# Altium PCB v1.0.PcbDoc
Units mm, origin at the board's own origin, x right, y up, seen from the top; angles counter-clockwise.
Board outline 33.9 x 45.2 mm, 2 copper layers (Top Layer, Bottom Layer), stack 1.569 mm thick; 15 components, 15 nets, 65 pads, 9 vias.
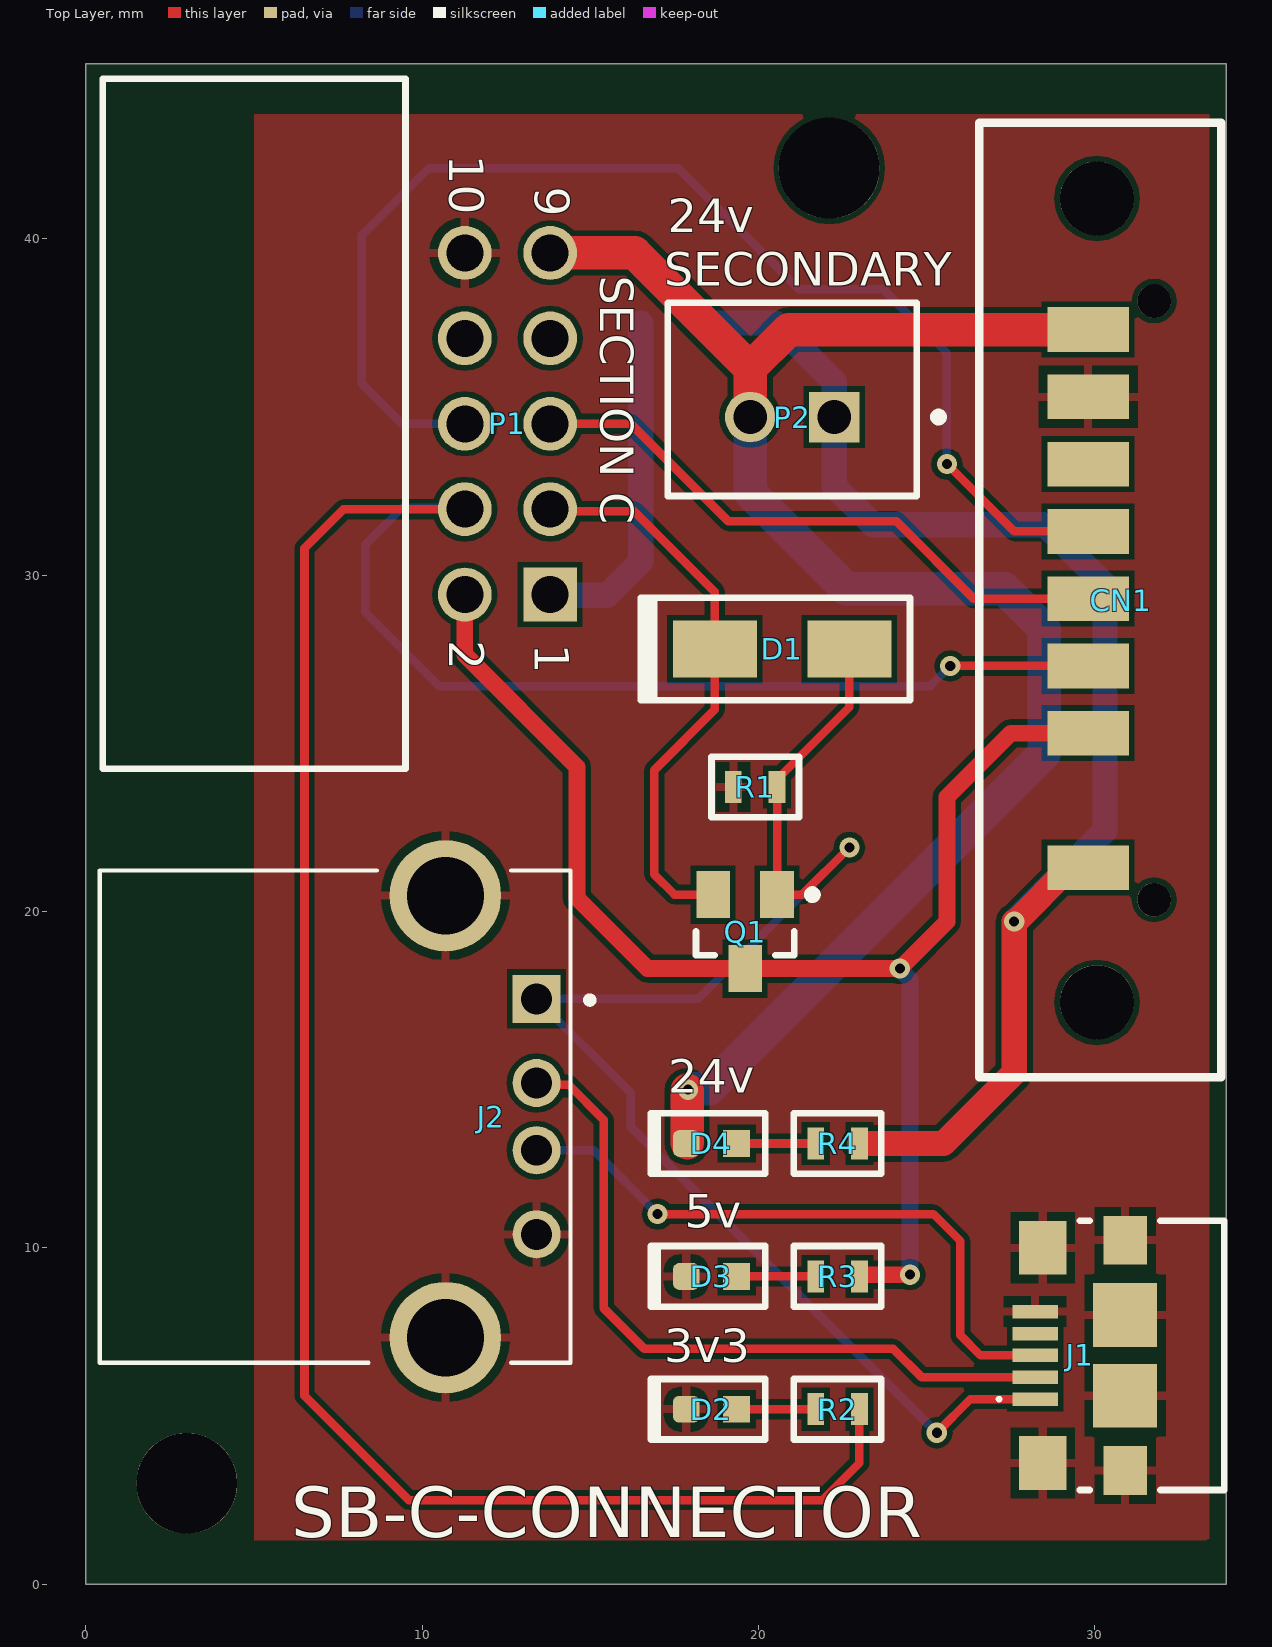
[diagram p0: Top Layer view]
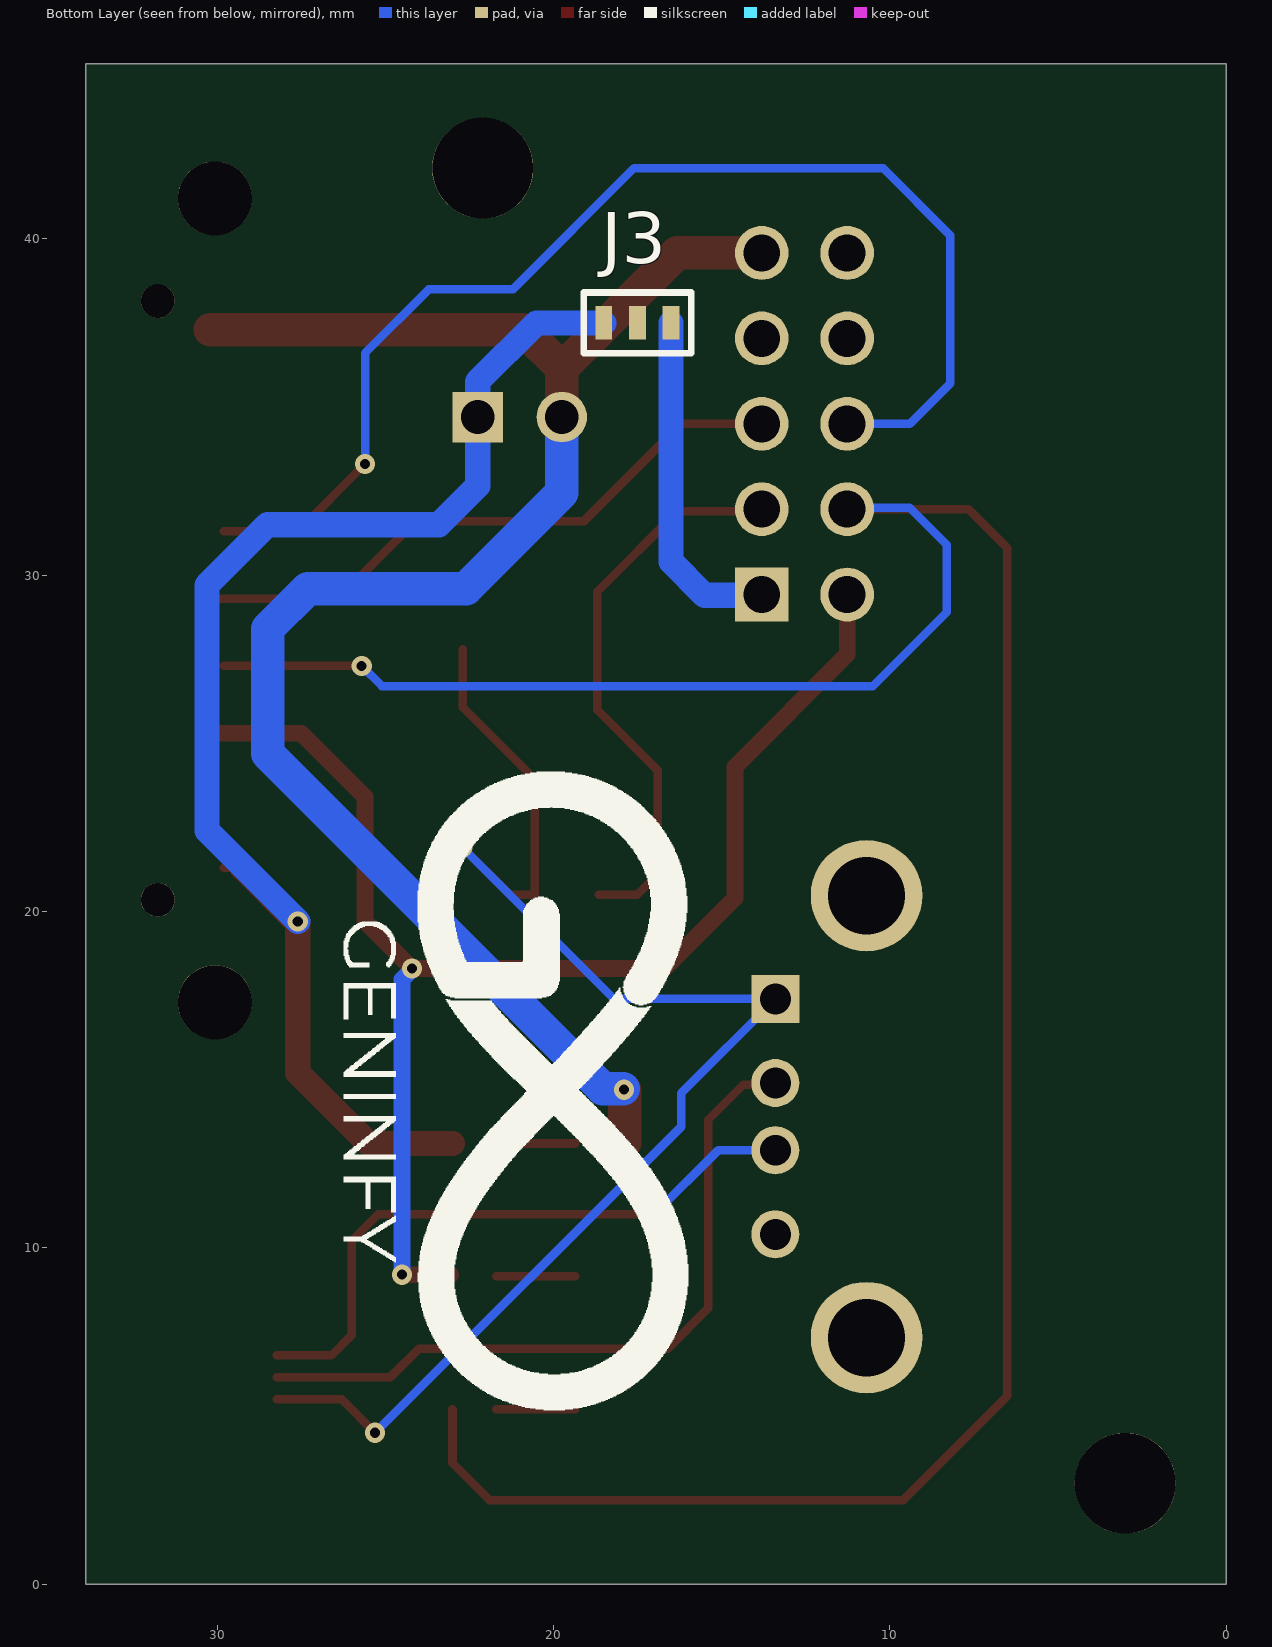
[diagram p1: Bottom Layer view, seen from below]
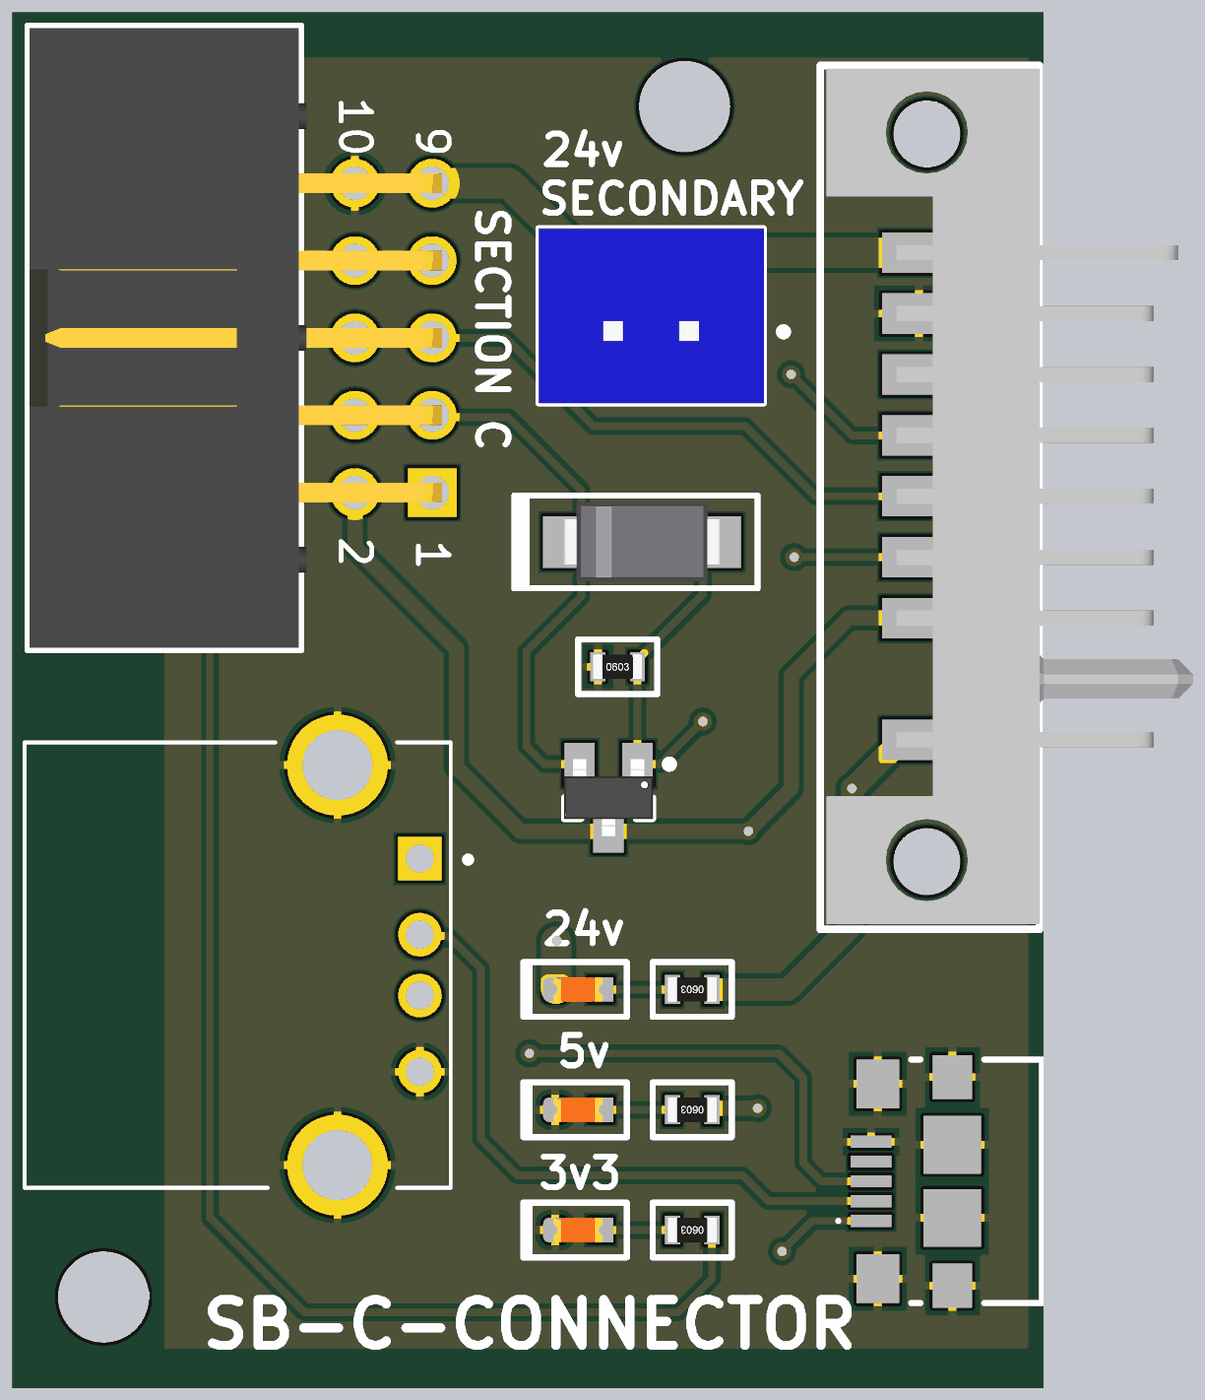
[diagram p2: 3D render of the assembled board from above, using the file's embedded part models]

## Layer stack, top to bottom
Top Solder: solder mask 0.0254, SM-001, Dk 4
Top Layer: signal copper 0.035
Dielectric 1: core 1.4986, Core-043, Dk 4.3
Bottom Layer: signal copper 0.035
Bottom Solder: solder mask 0.0254, SM-001, Dk 4

## Board outline
0,0 33.9,0 33.9,45.2 0,45.2

## Design rules (kind name [scope] priority, off if disabled: settings)
Clearance [All] p1: gap=0.16 ignorepadtopadclearanceinfootprint=FALSE
HoleSize [All] p1: absolutevalues=TRUE maxlimit=4 minlimit=0.025 maxpercent=80.000 minpercent=20.000
PolygonConnect [All] p1: connectstyle=Relief reliefconductorwidth=0.254 reliefentries=4 polygonreliefangle="90 Angle" airgapwidth=0.254
RoutingVias [All] p1: holewidth=0.711 width=1.27 viastyle="Through Hole" minholewidth=0.711 minwidth=1.27 maxholewidth=0.711 maxwidth=1.27
SilkToSolderMaskClearance [IsPad] p1: minsilkscreentomaskgap=0.2 clearancetoexposedcopper=TRUE
SolderMaskExpansion [All] p1: expansion=0.102 istentingtop=FALSE
Width [All] p1: maxlimit=4 minlimit=0.254 preferedwidth=0.254
28 further rules are at their usual default settings.

## Components (designator, comment, footprint, x,y, rotation, side; value= is the part's Value field where it differs from the comment)
CN1 "Battery CONN" 1747785-1 31.762,20.348 r90 top
D1 "1N4007" "M7 1N4007 SMA" 20.7,27.8 r180 top
D2 "LED - Orange" LED0603-Orange 18.6,5.2 r0 top
D3 "LED - Orange" LED0603-Orange 18.6,9.15 r0 top
D4 "LED - Orange" LED0603-Orange 18.6,13.1 r0 top
J1 "1981568-1" TECO-1981568-5_V 28.225,6.8 r90 top
J2 "292303-6" TE_292303-6 13.4,17.4 r270 top
J3 "Solder Jumper" "Solder Jumper" 17.5,37.5 r180 bottom
P1 "61201021721" 61201021721 5,34.5 r270 top
P2 "B2B-XH-A(LF)(SN)" JST-B2B-XH-A_V 21,34.7 r180 top
Q1 "FDN340P" FAIR-SSOT3L-3_V 19.6,19.4 r270 top
R1 "10k" "10k R0603" 19.9,23.7 r0 top
R2 "68R" "68R 0603" 22.35,5.2 r180 top
R3 "68R" "68R 0603" 22.35,9.15 r180 top
R4 "68R" "68R 0603" 22.35,13.1 r180 top

## Footprints (in the part's own frame and the unit in brackets; to place one, negate y for a bottom-side part, rotate by r counter-clockwise, add the part's x,y. Pads: shape width x height; smd on the part's side, far side on the other; paste and mask are expansions set on the pad)
"10k R0603" [mm]
  rect 0.5x0.95 smd: 1(-0.65,0) 2(0.65,0)
  silkscreen extent -1.3,-0.9 1.3,0.9, body extent -0.8,-0.4 0.8,0.4, height 0.45
"68R 0603" [mm]
  rect 0.5x0.95 smd: 1(-0.65,0) 2(0.65,0)
  silkscreen extent -1.3,-0.9 1.3,0.9, body extent -0.8,-0.4 0.8,0.4, height 0.45
1747785-1 [mm]
  rect 1.33x2.43 smd: 1(0.951,1.962) 2(4.951,1.962) 3(6.951,1.962) 4(8.952,1.962) 5(10.952,1.962) 6(12.952,1.962) 7(14.952,1.962) 8(16.952,1.962)
  round 2.2 hole 2.2 unplated: ""(-3.05,1.7) ""(20.85,1.7)
  round 1 hole 1 unplated: ""(0,0) ""(17.8,0)
  Top Layer lines w0.254: 20.838,1.712 20.826,1.7
  silkscreen extent -5.27,-2 23.1,5.2, body extent -5.1,-7.05 23,5, height 4.71
61201021721 [mm] "10 pins, right angled, gold plating"
  rect 1.6x1.6 hole 1.1: 1(5.08,8.805)
  round 1.6 hole 1.1: 2(5.08,6.265) 3(2.54,8.805) 4(2.54,6.265) 5(0,8.805) 6(0,6.265) 7(-2.54,8.805) 8(-2.54,6.265) 9(-5.08,8.805) 10(-5.08,6.265)
  silkscreen extent -10.26,-4.5 10.26,4.5, body extent -10.18,-4.42 10.18,9.13, height 9.23
FAIR-SSOT3L-3_V [mm] "SOT23, 3-Leads, Body 2.92x1.4mm, Pitch 0.95mm"
  rect 1.4x1 smd: 1(-1.1,0.95) 2(-1.1,-0.95) 3(1.1,0)
  silkscreen extent -1.22,-1.46 0.7,2.13, body extent -1.26,-1.46 1.26,1.46, height 1.12
JST-B2B-XH-A_V [mm] "Header, 2-Leads, Body 7.4x5.75mm, Pitch 2.5mm"
  rect 1.5x1.5 hole 1: 1(-1.25,0)
  round 1.5 hole 1: 2(1.25,0)
  silkscreen extent -4.47,-3.4 3.7,2.35, body extent -3.7,-3.4 3.7,2.35, height 7
LED0603-Orange [mm]
  rrect50% 0.8x0.8 smd: 1(-0.75,0)
  rect 0.8x0.8 smd: 2(0.75,0)
  silkscreen extent -1.8,-0.9 1.6,1, body extent -0.8,-0.4 0.8,0.4, height 0.7
"M7 1N4007 SMA" [mm]
  rect 2.5x1.7 smd: 1(-2,0) 2(2,0)
  silkscreen extent -3.8,-1.6 4.2,1.52, body extent -2.6,-1.3 2.6,1.3, height 2.42
"Solder Jumper" [mm]
  rect 0.5x1 smd: 1(-1,0) 2(0,0) 3(1,0)
  silkscreen extent -1.6,-0.9 1.6,0.9
TE_292303-6 [mm]
  rect 1.428x1.428 hole 0.92: 1(0,0)
  round 1.428 hole 0.92: 2(2.5,0) 3(4.5,0) 4(7,0)
  round 3.316 hole 2.3: S1(-3.07,-2.71) S2(10.07,-2.71)
  silkscreen extent -3.82,-12.99 10.81,1.68
TECO-1981568-5_V [mm] "SMD, 5-Leads, Body 8x5.9mm, Pitch 0.65mm"
  rect 0.4x1.35 smd: 1(-1.3,0) 2(-0.65,0) 3(0,0) 4(0.65,0) 5(1.3,0)
  rect 1.6x1.4 smd: 6(-3.2,-0.225) 7(3.2,-0.225)
  rect 1.45x1.3 smd: 8(-3.425,-2.675) 9(3.425,-2.675)
  rect 1.9x1.9 smd: 10(-1.2,-2.675) 11(1.2,-2.675)
  silkscreen extent -4,-5.63 4,1.12, body extent -4,-5.63 4,0.28, height 3

## Part data
CN1: library part 1747785-1
D1: library part 1N4007FLTR, "1000V 1A Rectifier", Manufacturer="Sangdest Microelectronics", Supplier Part Number 1=1655-1N4007FLCT-ND, Manufacturer Part Number=1N4007FLTR, Pricing 1="1=0.10000, 10=0.06600, 100=0.03120, 500=0.01848, 1000=0.01241 (USD)", RoHS=No, Stock 1=2517, Supplier 1=Digi-Key
D2 D3 D4: library part LTST-C191KFKT, "LED ORANGE CLEAR SMD", Case Code (Imperial)=0603, Case Code (Metric)=1608, Color=Orange, Forward Current=30mA, Forward Voltage=2V, Lens Color=Colorless, Manufacturer="Vishay Lite-On", Max Operating Temperature=85°C, Min Operating Temperature=-55°C, Package Quantity=1, Power Dissipation=75mW, Reverse Voltage=5V, Supplier Part Number 1=160-1445-1-ND, Test Current=20mA, Case/Package=0603, Category=LEDs, ComponentLink1Description=https://datasheet.ciiva.com/2109/ltst-c191kfkt-2109968.pdf?src-supplier=Digi-Key, ComponentLink1URL=https://datasheet.ciiva.com/2109/ltst-c191kfkt-2109968.pdf?src-supplier=Digi-Key, ComponentLink2Description=https://datasheet.ciiva.com/12400/100-ltst-c191kfkt-39904-12400811.pdf?src-supplier=Mouser, ComponentLink2URL=https://datasheet.ciiva.com/12400/100-ltst-c191kfkt-39904-12400811.pdf?src-supplier=Mouser, ComponentLink3Description=https://datasheet.ciiva.com/11775/0900766b80dc02b0-11775613.pdf?src-supplier=RSComponents, ComponentLink3URL=https://datasheet.ciiva.com/11775/0900766b80dc02b0-11775613.pdf?src-supplier=RSComponents, ComponentLink4Description=https://datasheet.ciiva.com/15201/getdatasheetpartid-631075-15201391.pdf?src-supplier=Verical, ComponentLink4URL=https://datasheet.ciiva.com/15201/getdatasheetpartid-631075-15201391.pdf?src-supplier=Verical, ComponentLink5Description=https://datasheet.ciiva.com/2109/s-110-ltst-c191kfkt-2109969.pdf?src-supplier=Digi-Key, ComponentLink5URL=https://datasheet.ciiva.com/2109/s-110-ltst-c191kfkt-2109969.pdf?src-supplier=Digi-Key, Depth=0.8mm, Dominant Wavelength=605nm, Height=0.55mm, Illumination Color=Orange, Lead Free="Lead Free", Length=1.6mm, Lens Style=Diffused,Colorless,Rectangular, Lens Transparency=Clear, Luminous Intensity=90mcd, Manufacturer Part Number=LTST-C191KFKT, Mount="Surface Mount", Number of Elements=1, Number of LEDs=1, Number of Pins=2, Packaging="Tape and Reel", Power Rating=75mW, Pricing 1="1=0.24000, 10=0.17900, 100=0.08460, 500=0.05640, 1000=0.04418, 2500=0.04324 (USD)", Radiation Hardening=No, RoHS=Yes, Stock 1=92562, Supplier 1=Digi-Key, Viewing Angle=130°, Wavelength=611nm, Width=0.8mm
J1: library part CMP-2000-05408-1, "Micro USB Receptacle Standard Type B Assy, 5-Pin SMD, RoHS, Tape and Reel", Current Rating (Max)=1/ContactA, Manufacturer="TE Connectivity", Operating Temp Range=-55Cto85C, Operating Temperature Max Deg. C=85C, Operating Temperature Min Deg. C=-55C, Voltage Rating Max=30VAC, Body Orientation=RightAngle, Contact Material=CopperAlloy, Contact Plating=GoldOverNickel, Datasheet URL=http://www.mouser.com/ds/2/418/NG_CD_1981568_E2-621296.pdf, Datasheet Version="Rev. E2, 08/2015", Gender=RCP, Housing Material=Thermoplastic, Manufacturer URL=http://www.te.com/, Mounting Style=SurfaceMount, Number of Contacts=5POS, Number of Ports=1Port, Number of Terminals=5, Packaging=TapeandReel, Pitch (mm)=0.65mm, Product Depth (mm)=5.6mm, Product Height (mm)=3mm, Product Length (mm)=8mm, Termination Method=Solder, Type=MicroUSB
J2: "Conn USB 2.0 Type A RCP 4 POS Solder RA Thru-Hole 4 Terminal 1 Port Tray", Package=None, Arrow_Electronics-Purchase-URL=https://snapeda.com/shop?store=Arrow+Electronics&id=521495, Availability=Good, BuyPart=https://www.snapeda.com/parts/292303-6/TE%20Connectivity%20AMP%20Connectors/view-part/521495/?ref=eda, Centerline_Pitch="2 mm[.078 in]", DigiKey-Purchase-URL=https://snapeda.com/shop?store=DigiKey&id=521495, EU_RoHS_Compliance=Compliant, MF="TE Connectivity", Mouser-Purchase-URL=https://snapeda.com/shop?store=Mouser&id=521495, MP=292303-6, Number_of_Positions=4, Price=None, Product_Type=Connector, SnapEDA_Link=https://www.snapeda.com/parts/292303-6/TE%20Connectivity%20AMP%20Connectors/view-part/521495/?ref=snap
P1: library part CMP-1502-00021-1, "Male Box Header WR-BHD, THT, Angled, pitch 2.54 mm, 10 pins", Contact Resistance=20mOhm, Manufacturer="Wurth Elektronik", Operating Temperature=-40to125degC, Withstanding Voltage=500VAC, Working Voltage=250VAC, Datasheet URL=https://katalog.we-online.de/em/datasheet/6120xx21721.pdf, Gender=Male, Manufacturer URL=http://www.we-online.de, Mounting Technology=THT, Orientation=Angled, Package Reference=61201021721, Packaging=Tray, Part Number=61201021721, Pin Number=10, Pitch=2.54mm, Published Date=August2018, Publisher=WurthElektronik
P2: library part CMP-2000-05888-1, "Male Header, Pitch 2.5 mm, 1 x 2 Position, Height 7 mm, Tail Length 3.4 mm, -25 to 85 degC, RoHS, Bulk", Manufacturer=JST, Package Description="Male Header, Pitch 2.5 mm, 1 x 2 Position, Height 7 mm, Tail Length 3.4 mm", Package Reference=B2B-XH-A, Datasheet URL=http://www.jst-mfg.com/product/pdf/eng/eXH.pdf, Datasheet Version=05/2016, Manufacturer URL=http://www.jst.com/home2.html, Mounting Technology=ThroughHole, No of Positions=2, Pitch=2.5mm, Style/Orientation=StraightHeader/Plug, Termination=Crimp, Type=ShroudedHeader
Q1: library part CMP-2100-03638-1, "Single P-Channel, Logic Level, PowerTrench(R) MOSFET, 2 A, 20 V, -55 to 150 degC, 3-Pin SOT-23, RoHS, Tape and Reel", Case/Package=SOT-23, Continuous Drain Current (ID)=2A, Current Rating=-2A, Drain to Source Breakdown Voltage=-20V, Drain to Source Resistance=60mOhm, Drain to Source Voltage (Vdss)=20V, Gate to Source Voltage (Vgs)=8V, Input Capacitance=779pF, Manufacturer="Fairchild Semiconductor", Max Operating Temperature=150degC, Max Power Dissipation=500mW, Min Operating Temperature=-55degC, Package Description="3-Pin Small Outline Transistor, Body 2.92 x 1.4 mm, Pitch 0.95 mm", Package Quantity=1, Package Reference=SSOT3L, Package Version="Rev. 3, 05/2015", Threshold Voltage=-800mV, Contact Plating=Tin, Datasheet URL=https://www.fairchildsemi.com/datasheets/FD/FDN340P.pdf, Datasheet Version="Rev. E1, 02/2007", Element Configuration=Single, Fall Time=11ns, Height=0.94mm, Lead Free=LeadFree, Length=2.92mm, Manufacturer URL=https://www.fairchildsemi.com/, Mount=SurfaceMount, Number of Elements=1, Number of Pins=3, Package URL=https://www.fairchildsemi.com/package-drawings/MA/MA03B.pdf, Packaging=TapeandReel, Power Dissipation=500mW, Radiation Hardening=No, Rds On Max=70mOhm, REACH SVHC=NoSVHC, Rise Time=9ns, RoHSCompliant=true, Termination=SMD/SMT, Turn-Off Delay Time=27ns, Turn-On Delay Time=10ns, Voltage Rating (DC)=-20V, Width=3.05mm
R1: library part CRG0603F10K/10, "RES 10.0K OHM 1/10W 1% 0603", Case Code (Imperial)=0603, Manufacturer="TE Connectivity", Max Operating Temperature=125°C, Max Power Dissipation=100mW, Min Operating Temperature=-55°C, Number of Resistors=1, Package Quantity=10000, Resistance=10kR, Resistor Type="Thick Film", Supplier Part Number 1=A121523CT-ND, Temperature Coefficient=100ppm/°C, Tolerance=1%, Voltage Rating=50V, Case/Package=0603, Category="Chip SMD Resistors", ComponentLink1Description=https://datasheet.ciiva.com/2530/eng-cd-1622829-ba-2530062.pdf?src-supplier=Digi-Key, ComponentLink1URL=https://datasheet.ciiva.com/2530/eng-cd-1622829-ba-2530062.pdf?src-supplier=Digi-Key, Depth=0.8mm, ELV=Compliant, Height=0.022inch, Length=1.6mm, Manufacturer Part Number=CRG0603F10K/10, Military Standard=Not, Mount="Surface Mount", Number of Terminations=2, Packaging="Tape and Reel", Power Rating=100mW, Pricing 1="1=0.10000, 10=0.03100, 100=0.01270, 1000=0.00570, 2500=0.00494, 5000=0.00409 (USD)", Radiation Hardening=No, RoHS=Yes, Stock 1=172089, Supplier 1=Digi-Key, Termination=Solder, Weight=7.1E-05oz, Width=0.8mm
R2 R3 R4: library part CRGP0603F68R, "CRGP 0603 68R 1%", Case Code (Imperial)=0603, Case Code (Metric)=1608, Manufacturer="TE Connectivity", Max Operating Temperature=155°C, Max Power Dissipation=250mW, Min Operating Temperature=-55°C, Resistor Type="Thick Film", Supplier Part Number 1=A130402CT-ND, Temperature Coefficient=200ppm/°C, Tolerance=1%, Case/Package=0603, Category="Chip SMD Resistors", ComponentLink1Description=https://www.te.com/commerce/DocumentDelivery/DDEController?Action=srchrtrv&amp;DocNm=9-1773463-9&amp;DocType=DS&amp;DocLang=English&src-supplier=Digi-Key, ComponentLink1URL=https://www.te.com/commerce/DocumentDelivery/DDEController?Action=srchrtrv&amp;DocNm=9-1773463-9&amp;DocType=DS&amp;DocLang=English&src-supplier=Digi-Key, Manufacturer Part Number=CRGP0603F68R, Number of Terminations=2, Packaging="Tape and Reel", Pricing 1="1=0.14000, 10=0.11400, 100=0.04470, 1000=0.01870, 2500=0.01714 (USD)", Resistance=68R, RoHS=No, Stock 1=49308, Supplier 1=Digi-Key

## Free pads (board coordinates)
  round 3 hole 3 unplated: ""(3,3) ""(22.1,42.1)

## Via types
v1: diameter 0.6/0.6 (per signal layer), hole 0.3, Top Layer to Bottom Layer, tented both sides, 9 vias

## Nets (pads, with @x,y where several pads share a name; then routed paths per layer and width w, separated by ;. In a path a pad name is that pad's centre, name@x,y a point inside that pad or via, vN(x,y) a via of type N, cw(c..) or ccw(c..) an arc to the next point about the centre after c; other vN are vias at no path point)
+3V3: CN1.3 P1.4 R2.1 | length 78.4
  Top Layer w0.254: P1.4 7.66,31.96 6.5,30.8 6.5,5.6 9.6,2.5 21.9,2.5 23,3.6 R2.1 ; v1(25.7,27.3) CN1.3
  Bottom Layer w0.254: P1.4 11.225,32 9.4,32 8.3,30.9 8.3,28.9 10.5,26.7 25.1,26.7 v1(25.7,27.3)
+5V: CN1.2 P1.2 Q1.3 R3.1 | length 42.7
  Top Layer w0.254: R3.1 R3.1@23.05,9.2
  Top Layer w0.5: P1.2 11.265,27.635 14.6,24.3 14.6,20.4 16.7,18.3 Q1.3 v1(24.2,18.3) 25.6,19.7 25.6,23.4 27.5,25.3 CN1.2@30.2,25.3 ; R3.1@23.05,9.2 v1(24.5,9.2)
  Bottom Layer w0.254: v1@24.2,18.278 v1(24.2,18.3)
  Bottom Layer w0.5: v1@24.2,18.278 24.5,17.978 v1(24.5,9.2)
+24V: CN1.1 J3.1 P2.1 R4.1 | length 41
  Top Layer w0.254: v1(27.6,19.7) v1@27.65,19.7 ; CN1.1@29.25,21.3 CN1.1
  Top Layer w0.75: R4.1 25.5,13.1 27.6,15.2 v1(27.6,19.7) ; v1@27.65,19.7 CN1.1@29.25,21.3
  Bottom Layer w0.254: v1@27.454,19.554 v1(27.6,19.7)
  Bottom Layer w0.75: J3.1 20.5,37.5 22.25,35.75 P2.1 22.25,32.65 23.4,31.5 28.5,31.5 30.3,29.7 30.3,22.4 v1(27.6,19.7)
D+: J1.3 J2.3 | length 19
  Top Layer w0.254: v1(17,11) 25.2,11 26,10.2 26,7.4 26.6,6.8 J1.3
  Bottom Layer w0.254: J2.3 15.1,12.9 v1(17,11)
D-: J1.2 J2.2 | length 21.7
  Top Layer w0.254: J2.2 13.446,14.854 14.346,14.854 15.4,13.8 15.4,8.2 16.6,7 24,7 24.85,6.15 J1.2
EXT_PWR: D1.2 P1.3 Q1.2 | length 17.1
  Top Layer w0.254: P1.3 13.865,31.9 16.3,31.9 18.7,29.5 D1.2 18.7,26 16.9,24.2 16.9,21.1 17.5,20.5 Q1.2
GND: CN1.7 D2.1 D3.1 J1.5 J1.6 J1.7 J1.8 J1.9 J1.10 J1.11 J2.4 J2.S1 J2.S2 P1.10 R1.1
NetD2_2: D2.2 R2.2 | length 2.4
  Top Layer w0.254: D2.2 R2.2
NetD3_2: D3.2 R3.2 | length 2.4
  Top Layer w0.254: D3.2 R3.2
NetD4_2: D4.2 R4.2 | length 2.4
  Top Layer w0.254: D4.2 R4.2
NetJ3_3: J3.3 P1.1 | length 10.2
  Bottom Layer w0.254: P1.1 P1.1@13.825,29.4
  Bottom Layer w0.75: P1.1@13.825,29.4 15.5,29.4 16.5,30.4 J3.3
PGND: CN1.8 D4.1 P1.9 P2.2 | length 52.5
  Top Layer w0.254: D4.1 D4.1@17.875,13.125 ; v1@17.875,14.675 v1(17.9,14.7)
  Top Layer w1: P1.9 16.32,39.58 19.75,36.15 ; D4.1@17.875,13.125 v1@17.875,14.675 ; P2.2 19.75,36.15 ; CN1.8@30.2,37.3 20.9,37.3 19.75,36.15
  Bottom Layer w0.254: P1.9 P1.9@13.825,39.6 ; v1(17.9,14.7) v1@17.928,14.728
  Bottom Layer w1: v1@17.928,14.728 18.528,14.728 28.495,24.695 28.495,28.405 27.3,29.6 22.6,29.6 19.75,32.45 P2.2
SCL: CN1.4 P1.5 | length 18.5
  Top Layer w0.254: P1.5 16.2,34.5 19.1,31.6 24.1,31.6 26.4,29.3 CN1.4@30.2,29.3
SDA: CN1.5 P1.6 | length 36.8
  Top Layer w0.254: v1(25.6,33.3) 27.6,31.3 CN1.5
  Bottom Layer w0.254: P1.6 9.4,34.5 8.2,35.7 8.2,40.1 10.2,42.1 17.6,42.1 21.2,38.5 23.7,38.5 25.6,36.6 v1(25.6,33.3)
V_USB: D1.1 J1.1 J2.1 Q1.1 R1.2 | length 43.3
  Top Layer w0.254: v1(22.7,21.9) 21.3,20.5 Q1.1 R1.2 20.55,23.925 22.7,26.075 D1.1 ; v1(25.3,4.5) 26.3,5.5 J1.1
  Bottom Layer w0.254: v1(22.7,21.9) 18.2,17.4 J2.1 16.2,14.6 16.2,13.6 v1(25.3,4.5)
pads on no net: CN1. CN1.6 J1.4 J3.2 P1.7 P1.8

## Polygon pours and split planes (outlines as drawn)
GND on Top Layer "GND_L01_P001" (solid, pour order 1): 5,43.7 33.4,43.7 33.4,1.2 33.3,1.3 5,1.3
no net on Top Layer "NONET_L01_P000" (solid, pour order 0): 5.1,41.8

## Silkscreen, mask and mechanical layers (free items; w line width, h text height)
Top Overlay:
  text "24v" at 17.3,40.2 h1
  text "SECTION C" at 15.3,38.9 h1 r270
  text "SECONDARY" at 17.2,38.6 h1
  text "24v" at 17.322,14.616 h1
  text "5v" at 17.8,10.6 h1
  text "3v3" at 17.2,6.6 h1
  text "SB-C-CONNECTOR" at 6.1,1.4 h1.5
Bottom Overlay:
  drawing of 9 lines, arcs and shapes, not listed

## Text inside footprints (layer, text, board x,y; h text height)
P1: Top Overlay "9" at 13.34,41.54 h1.02 r270; Top Overlay "10" at 10.8,42.5 h1.02 r270; Top Overlay "2" at 10.8,28.06 h1.02 r270; Top Overlay "1" at 13.34,27.96 h1.02 r270